# EAGLE board hbridge (EAGLE 9.6.2)
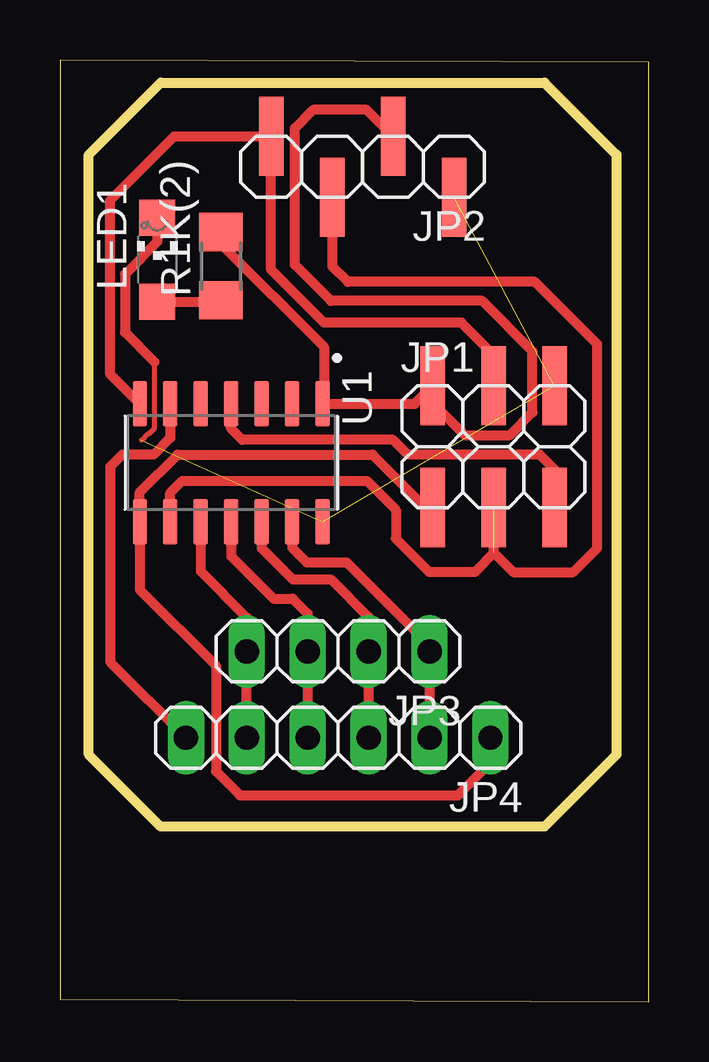
[diagram p0: board, top side]

Size 24.55 x 39.24 mm. Coordinates in mm from the lower left corner, seen from the top.
Outline: 0,0.1 24.55,0 24.55,39.14 0,39.24 0,0.1
Copper layers (1*16): Top 0.035mm / dielectric 1.5mm / Bottom 0.035mm
Design rules "default *": minimum track width 6mil, minimum drill 0.35mm, track to track 8mil, track to pad 8mil, pad to pad 8mil, via to via 8mil, smd to smd 8mil, copper to edge 40mil, drill to drill 6mil, minimum pad ring 10mil, minimum via ring 8mil, stop-mask expansion 4mil, vias tented up to drill 0mil, thermal gap 10mil

## Footprints (pad centres in the part's own frame; a part is rotated, then mirrored left to right if it is on the bottom)
2X03SMD = smd 1.016 x 3.302: 1 -1.27,-3.81; 2 -1.27,1.27; 3 1.27,-3.81; 4 1.27,1.27; 5 3.81,-3.81; 6 3.81,1.27
1X04SMD = smd 1.016 x 3.302: 1 -1.27,1.27; 2 1.27,-1.27; 3 3.81,1.27; 4 6.35,-1.27
1X04 = drill 1.016 long: 1 -3.81,0; 2 -1.27,0; 3 1.27,0; 4 3.81,0
1X06 = drill 1.016 long: 1 -6.35,0; 2 -3.81,0; 3 -1.27,0; 4 1.27,0; 5 3.81,0; 6 6.35,0
CHIPLED_1206 = smd 1.5 x 1.5: A 0,-1.75; C 0,1.75
R1206 = smd 1.6 x 1.803: 1 -1.422,0; 2 1.422,0
SOIC127P600X175-14N = smd 1.9 x 0.6: 1 -2.455,3.81; 2 -2.455,2.54; 3 -2.455,1.27; 4 -2.455,0; 5 -2.455,-1.27; 6 -2.455,-2.54; 7 -2.455,-3.81; 8 2.455,-3.81; 9 2.455,-2.54; 10 2.455,-1.27; 11 2.455,0; 12 2.455,1.27; 13 2.455,2.54; 14 2.455,3.81

## Placement (x,y rotation side)
JP1  [2X03SMD]  16.81,24.4 0 top
JP2  [1X04SMD]  15.16,34.79 180 top
JP3  [1X04]  11.6,14.6 180 top
JP4  [1X06]  11.6,11 180 top
LED1  [CHIPLED_1206]  4.06,30.92 0 top
R1K(2)  [R1206]  6.71,30.65 90 top
U1  ATTINY44A-SSU  [SOIC127P600X175-14N]  7.14,22.46 270 top

## Library data of the parts
JP1 JP2 = pinhead-2
JP3 JP4 = pinhead
LED1 = led
R1K(2) = rcl; SPICEPREFIX: R
U1 = ATTINY44A-SSU; AVAILABILITY: Unavailable; DESCRIPTION: AVR AVR® ATtiny Microcontroller IC 8-Bit 20MHz 4KB _2K x 16_ FLASH 14-SOIC; MF: Microchip; MP: ATTINY44A-SSU; PACKAGE: SOIC-14 Microchip; PRICE: None

## Nets
GND: JP1.6 JP2.1 LED1.C U1.14
N$1: JP3.1 JP4.2 U1.13
N$2: JP3.2 JP4.3 U1.12
N$3: LED1.A R1K(2).1
N$4: JP1.4 JP2.4 U1.7
N$5: JP3.3 JP4.4 U1.11
N$6: JP1.1 JP4.1 U1.8
N$7: JP3.4 JP4.5 U1.10
N$8: JP4.6 U1.6
N$9: JP1.5 U1.4
N$11: JP1.3 JP2.3 U1.9
VCC: JP1.2 JP2.2 R1K(2).2 U1.1

## Tracks (layer width: path | path; a pad name or v marks a point on that pad's centre or on a via)
GND  (3 unrouted)
  Top 0.203: 3.94,26.66 3.94,23.88 3.71,23.66 3.66,23.66 3.4,23.4
  Top 0.406: LED1.C 4.06,31.67 2.71,30.32 2.71,27.89 3.94,26.66
  pour Top: 1.2,35.3 4.2,38.3 20.2,38.3 23.2,35.3 23.2,10.3 20.2,7.3 4.2,7.3 1.2,10.3
N$1
  Top 0.406: JP4.2 JP3.1 15.41,14.85 11.96,18.3 11.95,18.31 10.29,18.31 9.68,18.92 U1.13
N$2
  Top 0.406: JP4.3 JP3.2 12.87,16.03 11.3,17.6 9.7,17.6 8.41,18.89 U1.12
N$3
  Top 0.406: 4.09,29.2 LED1.A 6.65,29.17 R1K(2).1
N$4
  Top 0.406: U1.7 2.1,26.14 2.1,33.4 4.76,36.06 JP2.4 8.81,30.49 11,28.3 16.74,28.3 18.08,26.96 JP1.4
N$5
  Top 0.406: JP4.4 JP3.3 10.33,16.17 9.7,16.8 8.9,16.8 7.14,18.56 U1.11
N$6
  Top 0.406: JP1.1 15.54,20.3 13.04,22.8 4.9,22.8 3.33,21.23 U1.8 3.33,17.17 6.5,14 6.5,9.6 7.5,8.6 16.6,8.6 17.95,9.95 JP4.1
N$7
  Top 0.406: JP4.5 JP3.4 7.79,16.01 5.87,17.93 U1.10
N$8
  Top 0.406: U1.6 4.6,23.5 3.9,22.8 2.6,22.8 2.1,22.3 2.1,14.15 JP4.6
N$9
  Top 0.406: JP1.5 20.62,22.18 20,22.8 14.5,22.8 13.89,23.41 7.6,23.41 7.14,23.87 U1.4
N$11  (1 unrouted)
  Top 0.406: U1.9 4.6,21.2 5.1,21.7 12.8,21.7 14,20.5 14,19.3 15.4,17.9 17.3,17.9 18.08,18.68 JP1.3 | 18.08,18.72 18.9,17.9 21.4,17.9 22.4,18.9 22.4,27.4 19.8,30 12,30 11.35,30.65 JP2.3
VCC
  Top 0.406: U1.1 11,24.91 | 11,24.91 14.79,24.91 JP1.2 15.54,24.96 16.89,23.61 18.76,23.61 19.71,24.56 19.71,27.1 17.61,29.2 11.3,29.2 9.8,30.7 9.8,36.4 10.56,37.16 12.79,37.16 JP2.2 | R1K(2).2 6.71,31.57 11,27.28 11,24.91